# Altium PCB IMU_Board.PcbDoc
Units mil, origin at the board's own origin, x right, y up, seen from the top; angles counter-clockwise.
Board outline 720 x 660 mil, 2 copper layers (Top Layer, Bottom Layer); 9 components, 8 nets, 51 pads, 10 vias.
Unrouted connection lines stored in the file: 1.
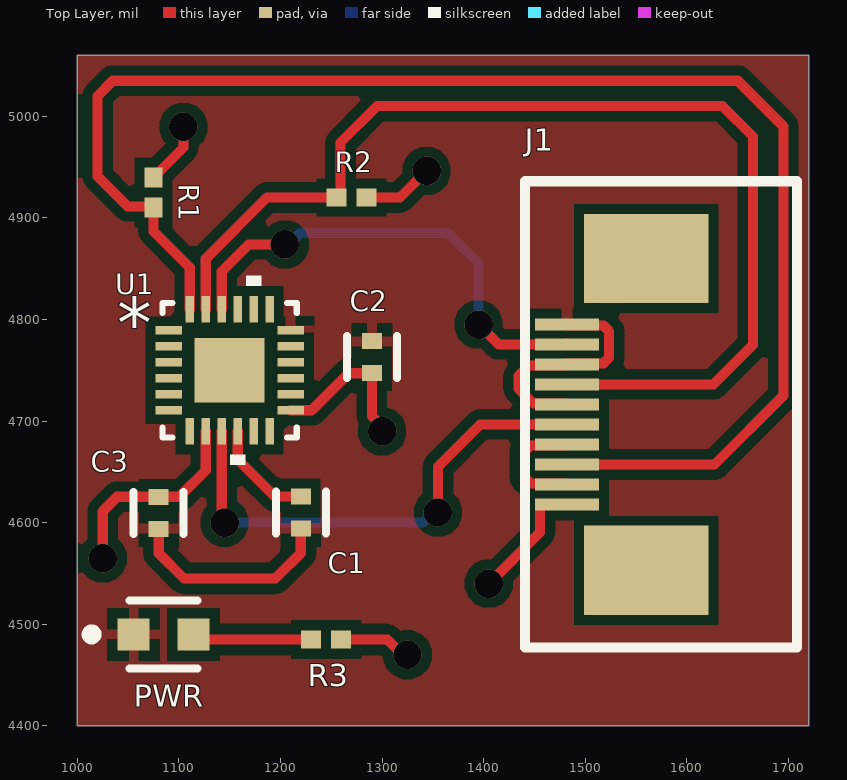
[diagram p0: Top Layer view]
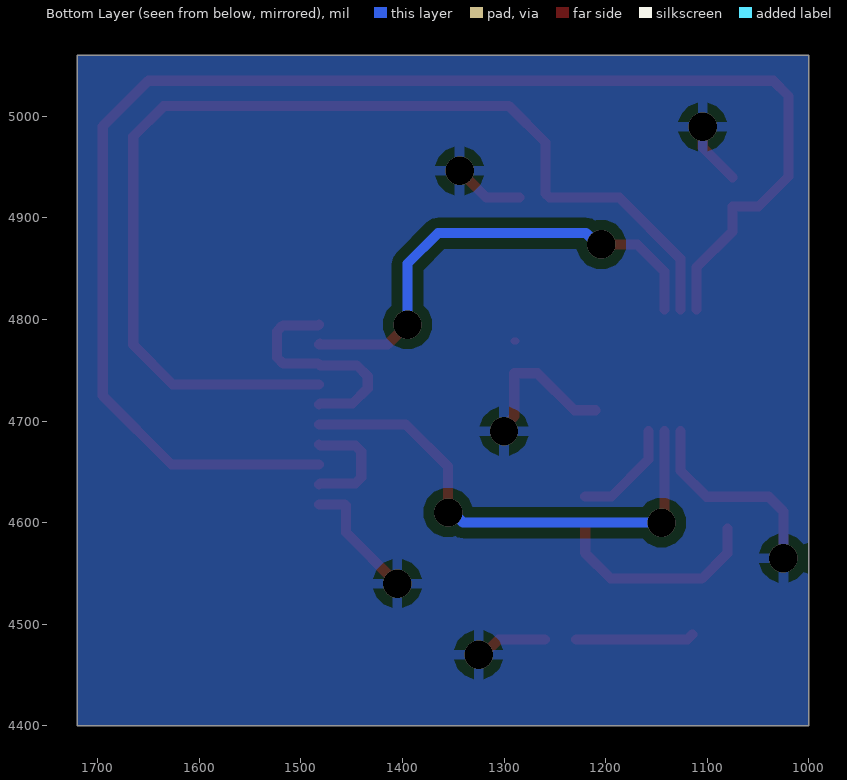
[diagram p1: Bottom Layer view, seen from below]
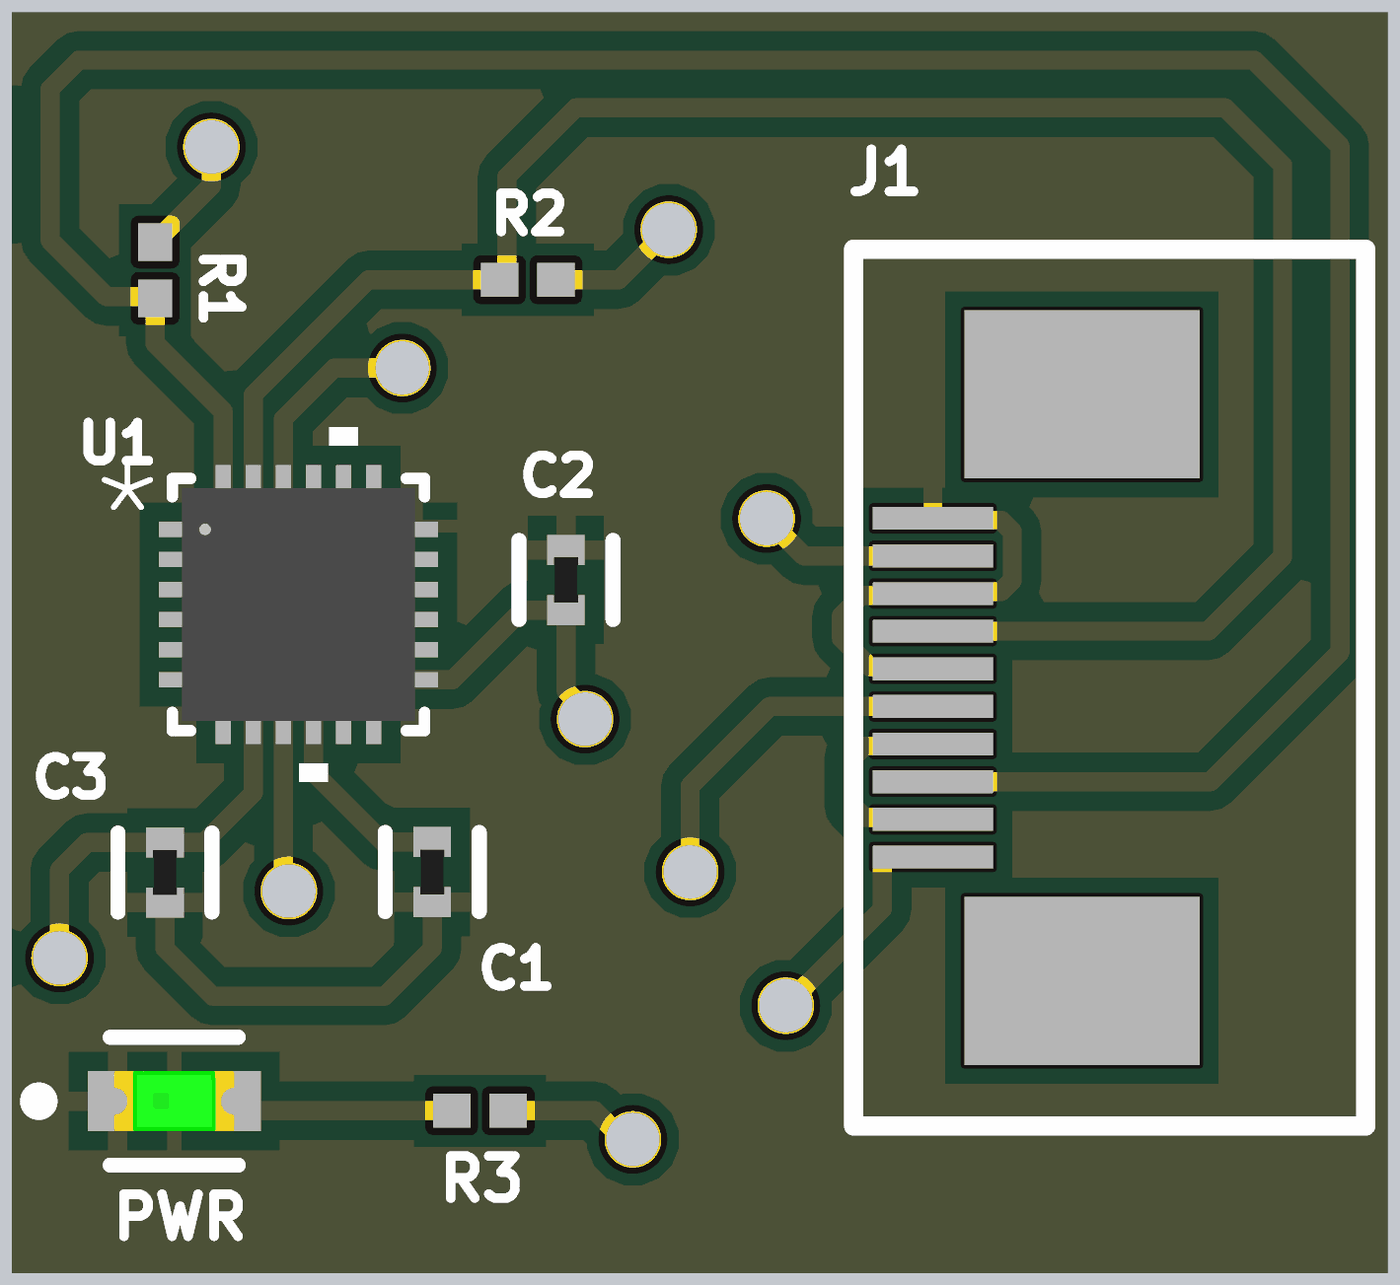
[diagram p2: 3D render of the assembled board from above, using the file's embedded part models]

## Layer stack, top to bottom
Top Solder: solder mask 0.4, Solder Resist, Dk 3.5
Top Layer: signal copper 1.4
Dielectric 1: dielectric 12.6, FR-4, Dk 4.8
Bottom Layer: signal copper 1.4
Bottom Solder: solder mask 0.4, Solder Resist, Dk 3.5

## Board outline
1000,4400 1720,4400 1720,5060 1000,5060

## Design rules (kind name [scope] priority, off if disabled: settings)
Clearance [All] p1: gap=10 ignorepadtopadclearanceinfootprint=TRUE except(0: Arc-Hole Track-Hole SMDPad-Hole THPad-Hole Via-Hole Fill-Hole Poly-Hole Region-Hole Text-Hole; 5: Arc-Arc Arc-Track Arc-SMDPad Arc-Via Track-Track Track-SMDPad Track-Via SMDPad-SMDPad SMDPad-Via THPad-Via)
ComponentClearance [All] p1: gap=0 collisioncheckmode=3 verticalgap=0 showdistances=FALSE
MinimumSolderMaskSliver [All] p1: minsoldermaskwidth=2
PolygonConnect [All] p1: connectstyle=Relief reliefconductorwidth=10 reliefentries=4 polygonreliefangle="90 Angle" airgapwidth=10
RoutingVias [All] p1: holewidth=28 width=25 viastyle="Through Hole" minholewidth=28 minwidth=15 maxholewidth=28 maxwidth=130
SolderMaskExpansion [All] p1: expansion=4 istentingtop=FALSE
Width [All] p1: maxlimit=15 minlimit=10 preferedwidth=10 minimp=50.000000 maximp=50.000000 favimp=50.000000
28 further rules are at their usual default settings.

## Components (designator, comment, footprint, x,y, rotation, side; value= is the part's Value field where it differs from the comment)
C1 "0.1uF" FP-GRM15-MFG 1220,4610 r270 top value=0.10μF
C2 "0.1uF" FP-GRM15-MFG 1290,4762.87 r270 top value=0.10μF
C3 "0.1uF" FP-GRM15-MFG 1080.16,4609.71 r90 top value=0.10μF
J1 "IMU FFC" ZF5S-10-01-X-WT 1482,4706.5 r90 top
PWR "LTST-C190GKT" FP-LTST-C190GKT-MFG 1085,4490 r0 top
R1 "10k" RESC1005X40X25LL05T10 1075,4925 r90 top
R2 "10k" RESC1005X40X25LL05T10 1270,4920 r180 top
R3 "10k" RESC1005X40X25LL05T10 1245,4485 r0 top
U1 "ICM-20649" QFN24_3X3X0P9_IVS 1150,4750 r0 top

## Footprints (in the part's own frame and the unit in brackets; to place one, negate y for a bottom-side part, rotate by r counter-clockwise, add the part's x,y. Pads: shape width x height; smd on the part's side, far side on the other; paste and mask are expansions set on the pad)
FP-GRM15-MFG [mm]
  rect 0.4x0.5 smd paste+0 mask+0: 1(-0.4,0) 2(0.4,0)
  silkscreen extent -0.53,-0.63 0.53,0.63, body extent -0.7,-0.38 0.7,0.38, height 0.25
FP-LTST-C190GKT-MFG [mm]
  rect 0.8x0.8 smd paste+0 mask+0: 1(-0.75,0) 2(0.75,0)
  silkscreen extent -1.92,-0.85 0.85,0.85, body extent -1.25,-0.55 1.25,0.55, height 0.25
QFN24_3X3X0P9_IVS [mil]
  rect 26x8 smd paste+0 mask+0: 1(-60,39.37) 2(-60,23.62) 3(-60,7.87) 4(-60,-7.87) 5(-60,-23.62) 6(-60,-39.37) 13(60,-39.37) 14(60,-23.62) 15(60,-7.87) 16(60,7.87) 17(60,23.62) 18(60,39.37)
  rect 8x26 smd paste+0 mask+0: 7(-39.37,-60) 8(-23.62,-60) 9(-7.87,-60) 10(7.87,-60) 11(23.62,-60) 12(39.37,-60) 19(39.37,60) 20(23.62,60) 21(7.87,60) 22(-7.87,60) 23(-23.62,60) 24(-39.37,60)
  rect 69x63 smd paste+0 mask+0: 25(0,0)
  silkscreen extent -66,-93 66,93, body extent -61,-61 61,61, height 37
RESC1005X40X25LL05T10 [mm] "Chip Resistor, 2-Leads, Body 1.00x0.50mm, IPC High Density"
  rect 0.5x0.45 smd: 1(-0.375,0) 2(0.375,0)
  body extent -0.53,-0.27 0.53,0.28, height 0.4
ZF5S-10-01-X-WT [mil]
  rect 12x63 smd mask+2: 1(-88.65,0) 2(-68.95,0) 3(-49.25,0) 4(-29.55,0) 5(-9.85,0) 6(9.85,0) 7(29.55,0) 8(49.25,0) 9(68.95,0) 10(88.65,0)
  rect 88x123 smd mask+2: G1(-153.5,-78) G2(153.5,-78)
  silkscreen extent -230,-226 230,42

## Part data
C1 C2 C3: library part CMP-2100-03641-2, "CAP CER 0.1UF 16V X7R 0402", Capacitance=0.10μF, Manufacturer=Murata, Manufacturer Part Number=GRM155R71C104KA88D, Package=GRM15, Temperature="-55°C to +125°C", Temperature Characteristic=X7R, Temperature Range High=+125°C, Temperature Range Low=-55°C, Tolerance=10%, Voltage Rating=16Vdc, Category=Cap, ComponentLink2Description=Datasheet, ComponentLink2URL=https://search.murata.co.jp/Ceramy/image/img/A01X/G101/ENG/GRM155R71H471KA01-01A.pdf, Device Class L1="Passive Components", Device Class L2=Capacitors, Device Class L3="Ceramic Capacitors", Digikey Description="CAP CER 0.1UF 16V X7R 0402", Height=0.55mm, Ipc Land Pattern Name=CAPC10050X219, Lead Free=yes, Material=Ceramic, Mouser Description="0402 0.1 uF 16V ±10 % Tolerance X7R SMT Multilayer Ceramic Capacitor", Octopart=https://octopart.com/grm155r71c104ka88d-murata-196880, RoHS=TRUE, Standoff Height=0mm
J1: library part ZF5S-10-01-X-WT, "ZERO INSERTION FORCE 0.5MM ASSEMBLY, 01 LEAD STYLE.", Manufacturer=SAMTEC, CREATED="January 30, 2015 - Wendy Xin", PCB DECAL=ZF5S-10-01-X-WT
PWR: library part CMP-22017-000005-2, "LED GREEN CLEAR CHIP SMD", Case Code (Imperial)=0603, Case Code (Metric)=1608, Color=Green, Forward Current=30mA, Forward Voltage=2.1V, Lens Color=Colorless, Max Operating Temperature=85°C, Min Operating Temperature=-55°C, Package Quantity=1, Power Dissipation=100mW, Reverse Voltage=5V, Test Current=10mA, Voltage=2V, Case/Package=0603, Depth=0.8mm, Dominant Wavelength=569nm, Height=0.8mm, Illumination Color=Green, Lead Free="Lead Free", Length=1.6mm, Lens Style=Clear, Lens Transparency=Clear, Luminous Intensity=6mcd, Mount="Surface Mount", Number of Elements=1, Number of LEDs=1, Number of Pins=2, Packaging="Tape and Reel", Power Rating=100mW, Radiation Hardening=No, Viewing Angle=130°, Wavelength=565nm, Width=0.8mm
R1 R2 R3: library part CMP-2002-07353-1, Manufacturer="Yageo / Phycomp", Part Number=RC0402FR-0710KL
U1: "No Description Available", Mfr_Name=InvenSense, Copyright="Copyright (C) 2023 Ultra Librarian. All rights reserved.", Manufacturer_Part_Number=ICM-20649, RefDes=RefDes, Type=DEV

## Via types
v1: diameter 28, hole 28, Top Layer to Bottom Layer, 10 vias

## Nets (pads, with @x,y where several pads share a name; then routed paths per layer and width w, separated by ;. In a path a pad name is that pad's centre, name@x,y a point inside that pad or via, vN(x,y) a via of type N, cw(c..) or ccw(c..) an arc to the next point about the centre after c; other vN are vias at no path point)
3V3: C2.2 C3.2 J1.1 R1.2 R2.1 R3.2 U1.8 U1.13 | length 687.1
  Top Layer w10: v1(1025,4565) 1025,4611.09 1039.36,4625.45 C3.2 1100.45,4625.45 1126.38,4651.38 U1.8 ; R1.2 1104.46,4969.22 v1(1104.46,4989.53) ; U1.13 1230.63,4710.63 1267.13,4747.13 C2.2 1290,4704.87 1300,4694.87 v1(1300,4690) ; R3.2 1305.13,4485 1320.13,4470 v1(1325,4470) ; R2.1 1317.55,4920 v1(1343.77,4946.23) ; v1(1405,4540) 1455.5,4590.5 1455.5,4616.85 1456.5,4617.85 J1.1
GND: C1.2 C2.1 C3.1 J1.2 J1.4 J1.6 J1.8 J1.10 PWR.1 U1.18 | length 558.5
  Top Layer w7: C2.1@1288.03,4778.62 C2.1
  Top Layer w10: C3.1 1080.16,4569.84 1105,4545 1195,4545 1220,4570 C1.2 ; J1.2 1481,4638.55 1446.36,4638.55 1440.5,4644.41 1440.5,4670.09 1446.36,4675.95 1481,4675.95 J1.4 ; J1.6 1481,4717.35 1449.06,4717.35 1434.14,4732.27 1434.14,4744.14 1444.75,4754.75 1481,4754.75 1483,4756.75 1517.64,4756.75 1523.5,4762.61 1523.5,4788.29 1517.64,4794.15 1483,4794.15 J1.10
MISO: J1.5 U1.9 | length 494.6
  Top Layer w10: U1.9 1142.13,4602.87 v1(1145,4600) ; v1(1355,4610) 1355,4655 1396.65,4696.65 J1.5
  Bottom Layer w10: v1(1145,4600) 1340.13,4600 1350.13,4610 v1(1355,4610)
nCS: J1.9 U1.22 | length 474.6
  Top Layer w10: U1.22 1142.13,4847.13 1168.82,4873.82 v1(1204.35,4873.82) ; v1(1395,4795) 1414.55,4775.45 J1.9 J1.9@1481,4776.45
  Bottom Layer w10: v1(1204.35,4873.82) 1208.03,4873.82 1219.2,4885 1365,4885 1395,4855 v1(1395,4795)
NetC1_1: C1.1 U1.10 | length 105.1
  Top Layer w10: U1.10 1157.87,4662.13 1194.25,4625.75 C1.1
NetPWR_2: PWR.2 R3.1 | length 116.8
  Top Layer w10: PWR.2 1119.53,4485 R3.1@1229.25,4485
SCL: J1.7 R2.2 U1.23 | length 1096.6
  Top Layer w10: U1.23 1126.38,4859.75 1186.63,4920 R2.2 1259.1,4923.86 1259.1,4974.1 1295,5010 1635,5010 1665,4980 1665,4775 1626.05,4736.05 J1.7
SDA_MOSI: J1.3 R1.1 U1.24 | length 1468.4
  Top Layer w10: U1.24 1110.63,4851.06 1075,4886.69 1075,4911.22 1049.55,4911.22 1020,4940.77 1020,5020 1035,5035 1650,5035 1695,4990 1695,4725 1627.25,4657.25 J1.3
pads on no net: J1.G1 J1.G2 U1.1 U1.2 U1.3 U1.4 U1.5 U1.6 U1.7 U1.11 U1.12 U1.14 U1.15 U1.16 U1.17 U1.19 U1.20 U1.21 U1.25

## Polygon pours and split planes (outlines as drawn)
GND on Top Layer "GND_L01" (solid, pour order 0): 1000,5060 1720,5060 1720,4400 1000,4400
3V3 on Bottom Layer "GND_L01" (solid, pour order 1): 1000,5060 1720,5060 1720,4400 1000,4400

## Text inside footprints (layer, text, board x,y; h text height)
U1: Top Overlay "*" at 1039.5,4772.24 h50; Mechanical 13 "*" at 1090.5,4772.24 h50